# Altium PCB PCB.PcbDoc (part 3 of 3)
Units mm, origin at the board's own origin, x right, y up, seen from the top; angles counter-clockwise.
Board outline 68.58 x 53.34 mm, 4 copper layers (TOP, GND, SIG, BOTTOM), stack 1.586 mm thick; 257 components, 121 nets, 724 pads, 316 vias.
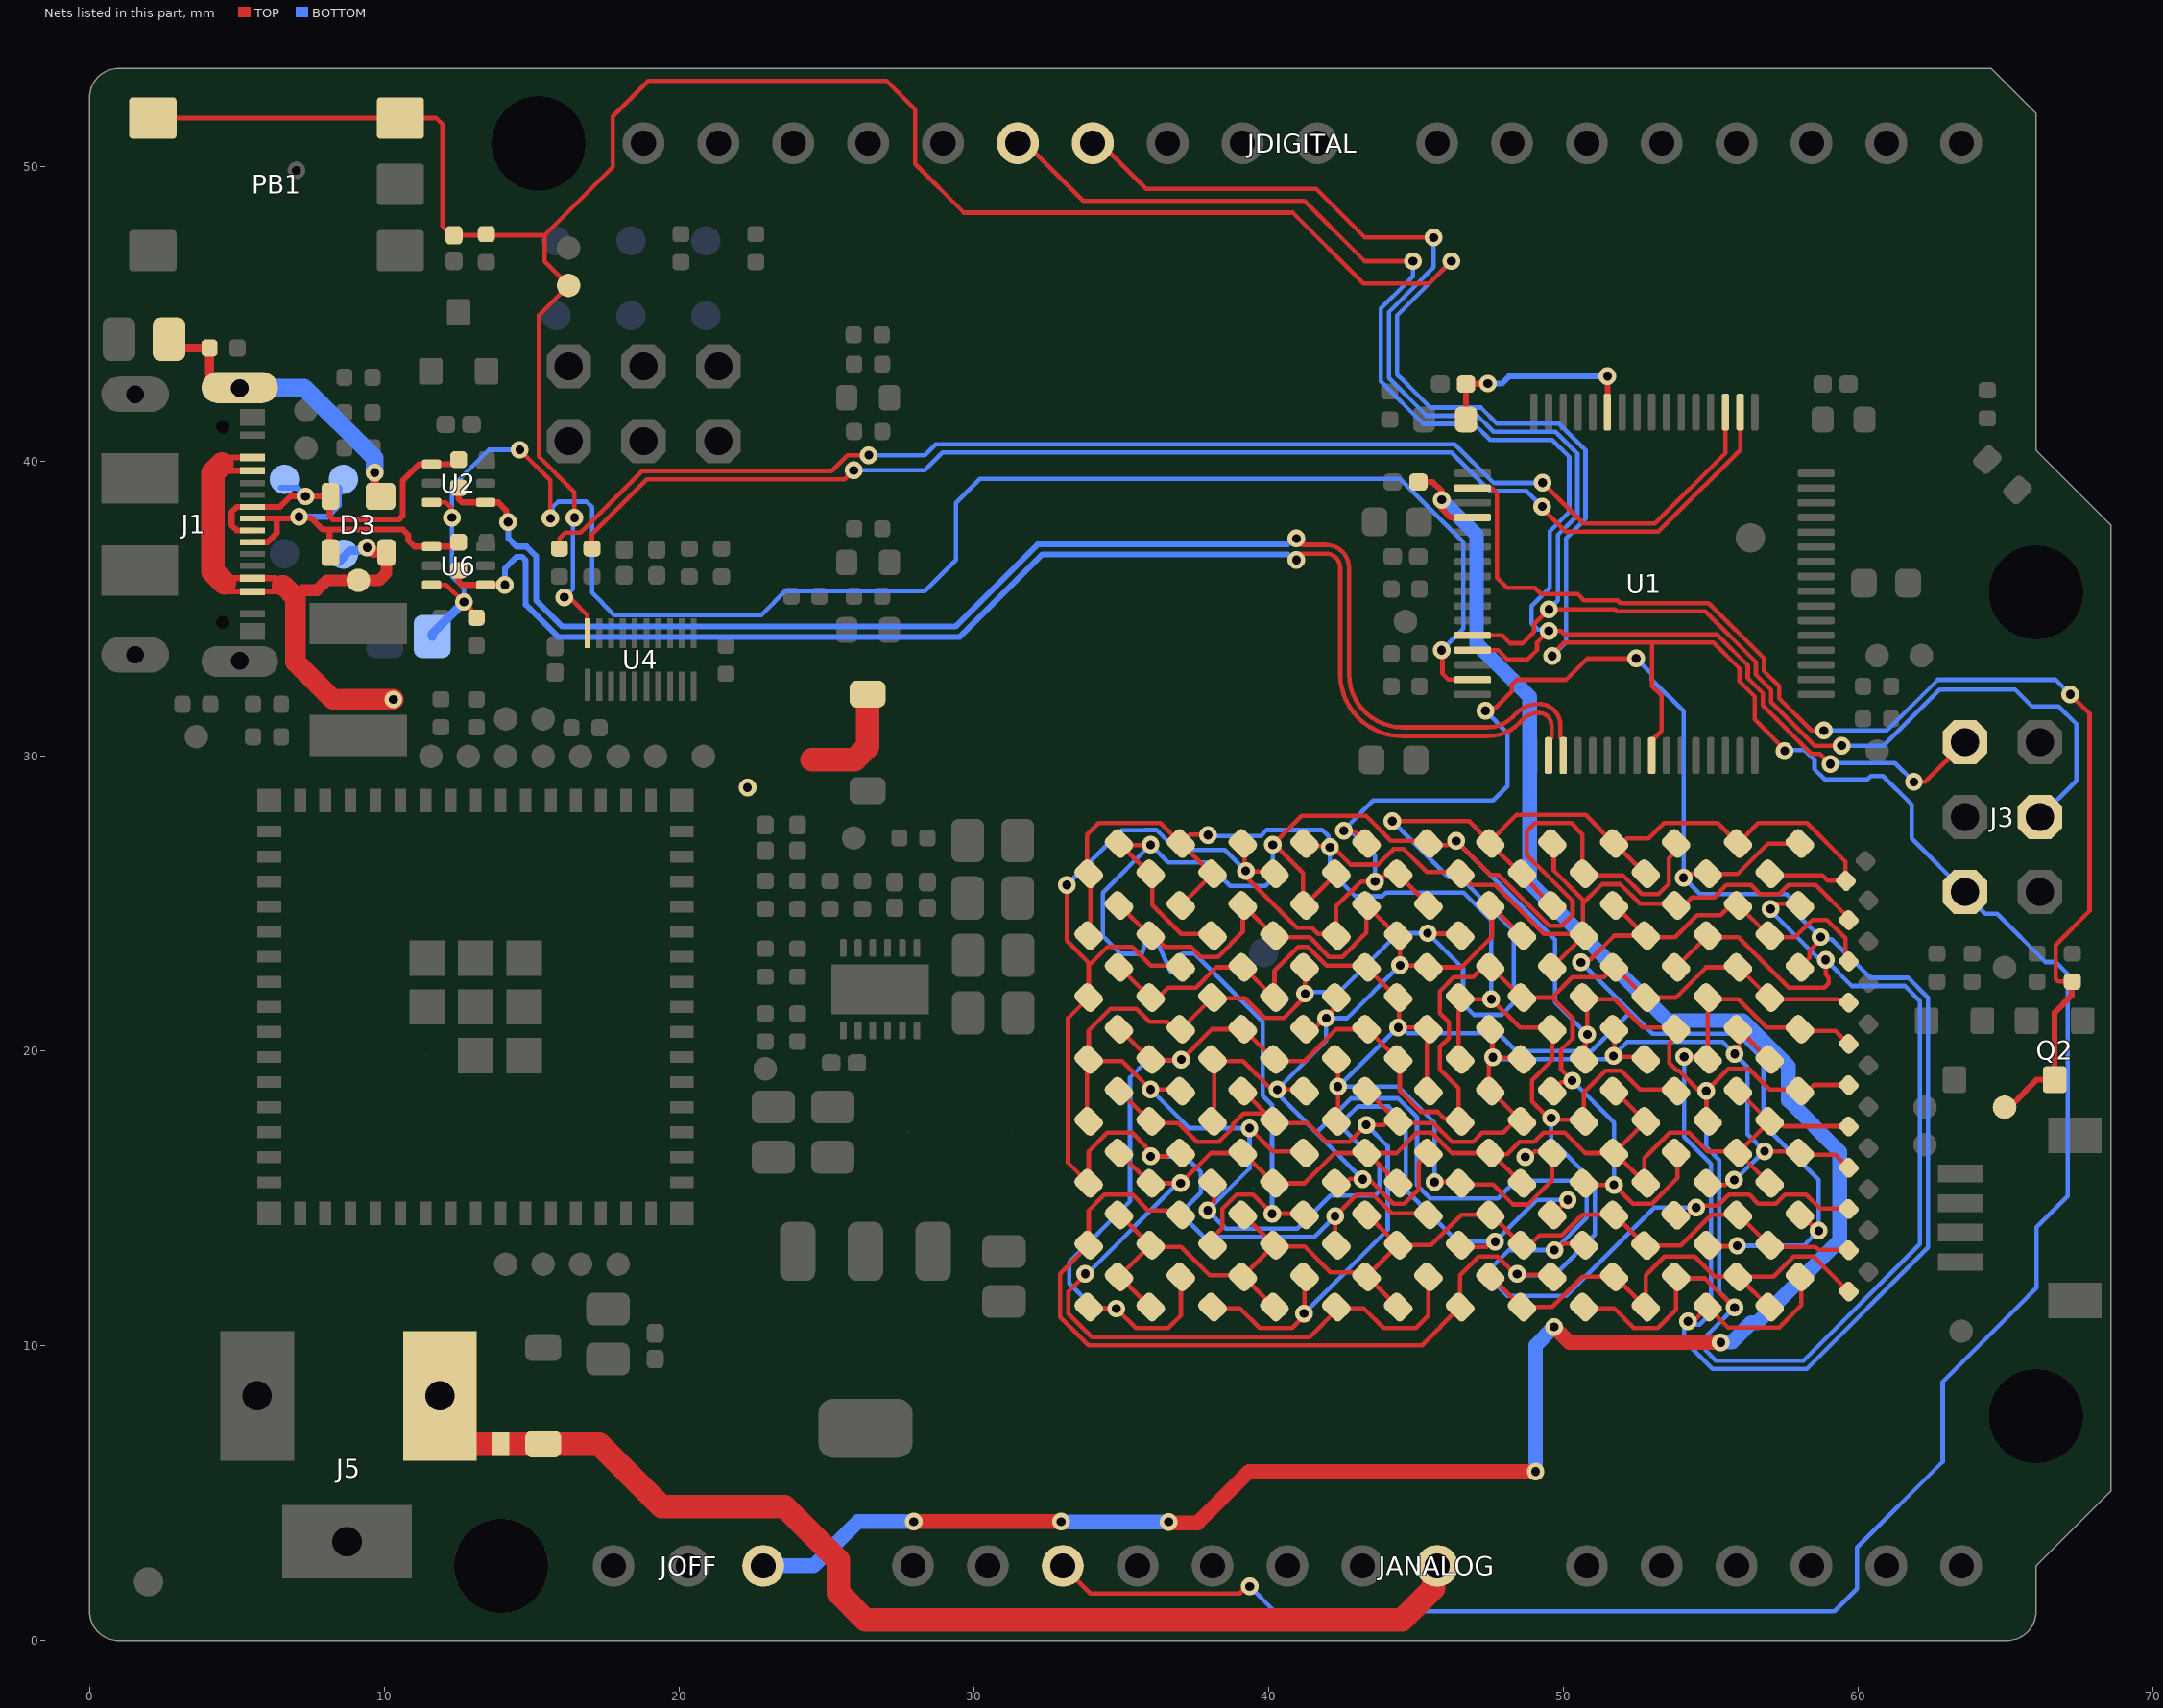
[diagram p5: the nets of this part, all layers, seen from the top]

## Via types
v1: diameter 0.6, hole 0.3, TOP to BOTTOM, tented both sides, 316 vias

## Nets (pads, with @x,y where several pads share a name; then routed paths per layer and width w, separated by ;. In a path a pad name is that pad's centre, name@x,y a point inside that pad or via, vN(x,y) a via of type N, cw(c..) or ccw(c..) an arc to the next point about the centre after c; other vN are vias at no path point) (continued)
P401_IIC0_SDA_1: P401_SDA.X Q2.3 R12.2 U1.2 | length 43.4
  TOP w0.15: U1.2@46.925,39.103 47.574,39.103 47.752,38.925 47.752,36.054 48.088,35.718 49.03,35.718 49.248,35.5 50.493,35.5 50.7,35.293 51.84,35.293 51.933,35.2 54.93,35.2 56.813,33.317 56.813,32.885 57.324,32.373 57.324,31.962 58.411,30.876 v1(58.842,30.876) ; v1(67.2,32.1) 67.854,31.446 67.854,24.754 66.7,23.6 66.7,22.447 66.788,22.359 R12.2@67.27,22.359
  TOP w0.2: P401_SDA.X@64.986,18.134 65.17,18.134 66.07,19.034 Q2.3@66.67,19.034 66.67,21.313 67.245,21.889 67.245,22.335 R12.2@67.27,22.359
  BOTTOM w0.15: v1(58.842,30.876) 60.982,30.876 62.706,32.6 66.7,32.6 v1(67.2,32.1)
P408_1: R1.2 SJ1.2 U1.15 U2.6 U6.6 | length 58.9
  TOP w0.15: U6.6@11.605,35.816 12.105,35.816 12.685,35.236 v1(12.704,35.236) 12.704,35.224 13.202,34.726 R1.2@13.225,34.726 ; U2.6@11.605,38.616 12.084,38.616 12.3,38.4 v1(12.3,38.1) ; v1(14.6,40.4) 15.639,39.361 v1(15.639,38.075) ; v1(45.873,33.6) 45.9,33.573 45.9,32.8 46.097,32.603 U1.15@46.925,32.603
  BOTTOM w0.15: v1(12.704,35.236) 12.704,35.696 12.3,36.1 v1(12.3,38.1) 12.3,39.146 13.554,40.4 v1(14.6,40.4) ; v1(15.639,38.075) 15.708,38.144 15.708,38.449 15.901,38.642 16.854,38.642 17.047,38.449 17.047,35.553 17.808,34.792 22.792,34.792 23.6,35.6 28.343,35.6 29.4,36.657 29.4,38.6 30.209,39.409 44.458,39.409 46.603,37.264 46.603,34.33 v1(45.873,33.6)
  BOTTOM w0.3: SJ1.2@11.63,34.066 11.63,34.162 v1(12.704,35.236)
P410_SPI0_MISO_GPT6_B_1: J3.1 JDIGITAL.13 U1.13 | length 54.6
  TOP w0.15: JDIGITAL.13@31.496,51.054 33.706,48.844 41.22,48.844 43.264,46.8 v1(44.9,46.8) ; U1.13@46.925,33.603 47.789,33.603 48.097,33.295 48.795,33.295 49.108,33.608 49.108,33.857 49.416,34.166 49.506,34.166 v1(49.506,34.256) ; v1@49.552,34.211 49.597,34.256 49.936,34.256 50.05,34.142 55.205,34.142 56.259,33.088 56.259,32.655 56.77,32.143 56.77,31.733 58.416,30.087 58.71,30.087 v1(59.058,29.739) ; v1(61.893,29.132) 62.279,29.132 J3.1@63.627,30.48
  BOTTOM w0.15: v1(44.9,46.8) 44.9,46.283 44.646,46.029 43.805,45.189 43.805,43.036 43.805,42.725 45.25,41.28 46.976,41.28 47.52,40.736 49.626,40.736 50.2,40.162 50.2,38.289 49.542,37.63 49.542,35.721 48.918,35.098 48.918,34.516 49.131,34.303 49.459,34.303 v1(49.506,34.256) ; v1(59.058,29.739) 59.095,29.776 61.249,29.776 v1(61.893,29.132)
P411_SPI0_MOSI_GPT6_A_1: J3.4 JDIGITAL.12 U1.12 | length 60.1
  TOP w0.15: JDIGITAL.12@34.036,51.054 35.846,49.244 41.62,49.244 43.264,47.6 v1(45.6,47.6) ; U1.12@46.925,34.103 47.925,34.103 48.192,33.835 48.625,33.835 49.004,34.214 49.004,34.474 v1(49.515,34.985) 51.757,34.985 51.818,34.923 54.815,34.923 56.536,33.203 56.536,32.77 57.047,32.258 57.047,31.848 58.531,30.364 v1(59.439,30.364)
  BOTTOM w0.15: v1(45.6,47.6) 45.6,46.592 44.923,45.915 44.082,45.074 44.082,43.151 44.082,42.84 45.365,41.557 47.091,41.557 47.635,41.013 49.74,41.013 50.361,40.392 50.477,40.277 50.477,38.174 50.354,38.051 49.819,37.516 49.819,35.289 v1(49.515,34.985) ; v1(59.439,30.364) 60.862,30.364 62.768,32.27 65.33,32.27 65.9,31.7 66.8,31.7 67.4,31.1 67.4,29.173 J3.4@66.167,27.94
P501_SCI1_TXD_1: R45.1 U1.50 | length 44.2
  TOP w0.15: R45.1@17.046,37.051 17.046,37.537 18.909,39.4 25.622,39.4 v1(25.925,39.703) ; v1(49.286,38.476) 49.286,38.414 50.079,37.621 53.224,37.621 53.553,37.949 56,40.396 U1.50@56,41.678
  BOTTOM w0.15: v1(25.925,39.703) 28.333,39.703 28.94,40.31 46.207,40.31 47.519,38.997 48.764,38.997 v1(49.286,38.476)
P502_SCI1_RXD_1: R46.1 U1.51 | length 44.7
  TOP w0.15: R46.1@15.946,37.051 15.946,37.393 16.144,37.592 16.662,37.592 18.747,39.677 25.177,39.677 25.717,40.217 v1(26.439,40.217) ; v1(49.299,39.281) 50.682,37.898 53.11,37.898 55.496,40.284 U1.51@55.496,41.674
  BOTTOM w0.15: v1(26.439,40.217) 28.338,40.217 28.708,40.587 46.321,40.587 47.634,39.274 49.292,39.274 v1(49.299,39.281)
R\E\S\E\T\_1: C1.1 J3.5 JANALOG.3 PB1.3 PB1.4 R3.1 RES.X U1.25 U4.20 | length 170.1
  TOP w0.15: PB1.4@2.15,51.653 10.266,51.653 PB1.3@10.357,51.744 ; PB1.3@10.55,51.653 11.757,51.653 11.966,51.444 11.966,47.99 12.083,47.872 12.173,47.872 C1.1@12.366,47.679 15.438,47.679 ; RES.X@16.056,45.934 16.056,45.774 15.24,44.958 15.24,40.17 16.454,38.956 v1(16.454,38.094) ; v1(16.11,35.399) 16.196,35.313 16.363,35.313 16.896,34.78 U4.20@16.896,34.176 ; RES.X@16.256,45.974 15.438,46.792 15.438,47.679 ; JANALOG.3@33.02,2.54 33.96,1.6 39.02,1.6 39.26,1.84 v1(39.36,1.84) ; v1(46.2,46.8) 45.444,46.044 43.22,46.044 40.82,48.444 29.664,48.444 28.009,50.099 28.009,51.946 27.043,52.912 18.956,52.912 17.75,51.706 17.75,49.991 15.438,47.679 ; v1(49.621,33.404) 49.621,33.453 50.033,33.865 53.01,33.865 ; U1.25@53.01,30.038 53.01,30.538 53.33,30.858 53.33,32.064 53.01,32.385 53.01,33.865 ; v1(57.509,30.186) 57.509,30.237 56.493,31.252 56.493,32.029 55.982,32.54 55.982,32.973 55.09,33.865 53.01,33.865 ; J3.5@63.358,25.4 J3.5@63.627,25.4
  BOTTOM w0.15: v1(16.11,35.399) 16.4,35.689 16.4,38.039 v1(16.454,38.094) ; v1(39.36,1.84) 40.2,1 59.2,1 59.961,1.761 59.961,3.161 62.871,6.071 62.871,8.788 65.447,11.365 66.058,11.975 66.058,14.031 67.106,15.079 67.106,22.618 66.7,23.024 66.356,23.024 64.718,24.661 64.313,24.661 63.627,25.347 J3.5@63.627,25.4 61.814,27.213 61.814,28.364 60.845,29.332 60.429,29.332 60.316,29.219 58.868,29.219 58.523,29.564 58.523,29.873 58.184,30.213 57.535,30.213 v1(57.509,30.186) ; v1(46.2,46.8) 44.359,44.959 44.359,42.954 44.584,42.73 44.878,42.436 45.48,41.834 47.205,41.834 47.749,41.29 49.855,41.29 50.638,40.507 50.754,40.391 50.754,38.059 50.631,37.936 50.096,37.401 50.096,33.879 v1(49.621,33.404)
RA4_1_N: R55.1 U1.18 U6.1 | length 48.2
  TOP w0.15: v1(40.946,36.663) cw(c41.16,36.663) 41.16,36.876 41.946,36.876 cw(c41.946,36.391) 42.431,36.391 42.431,32.791 ccw(c44.534,32.791) 44.534,30.688 47.46,30.688 ccw(c47.461,32.129) 48.477,31.107 48.478,31.108 48.634,31.264 cw(c49.146,30.752) 49.146,31.476 49.18,31.476 cw(c49.18,31.056) 49.6,31.056 49.6,30.628 49.5,30.528 U1.18@49.5,30.028
  TOP w0.2: R55.1@12.525,36.316 12.525,35.933 12.642,35.816 U6.1@13.445,35.816 ; U6.1@13.446,35.815 v1@14.093,35.815
  BOTTOM w0.2: v1(14.094,35.814) 14.094,36.374 14.487,36.767 14.684,36.767 14.801,36.65 14.801,35.145 15.895,34.051 29.521,34.051 32.321,36.851 40.649,36.851 40.838,36.663 v1(40.946,36.663)
RA4_1_P: R54.1 U1.19 U2.1 | length 49.1
  TOP w0.15: v1(40.946,37.39) ccw(c41.16,37.39) 41.16,37.176 41.946,37.176 cw(c41.946,36.391) 42.731,36.391 42.731,32.791 ccw(c44.534,32.791) 44.534,30.988 47.46,30.988 47.461,30.988 ccw(c47.461,32.129) 48.265,31.32 48.423,31.477 cw(c49.145,30.754) 49.145,31.776 49.18,31.776 cw(c49.18,31.056) 49.9,31.056 49.9,30.628 50,30.528 U1.19@50,30.028
  TOP w0.2: R54.1@12.525,39.116 12.525,38.733 12.642,38.616 13.875,38.616 14.144,38.347 14.144,38.005 v1(14.202,37.947)
  BOTTOM w0.2: v1(14.202,37.947) 14.214,37.935 14.214,37.39 14.487,37.117 14.829,37.117 15.151,36.795 15.151,35.29 16.04,34.401 29.376,34.401 32.176,37.201 36.509,37.201 40.649,37.201 40.838,37.39 v1(40.946,37.39)
ROW0_2: 1.A 2.C 3.A 4.C 7.A 8.C 13.A 14.C 21.A 22.C 31.A 32.C 43.A 44.C 57.A 58.C 73.A 74.C 91.A 92.C R34.1 | length 102.5
  TOP w0.15: 13.A@33.9,23.918 33.887,23.931 33.887,24.322 33.953,24.388 33.953,25.965 1.A@33.9,26.018 33.847,26.071 33.847,27.347 34.233,27.733 36.335,27.733 2.C@37.025,27.043 ; 74.C@37.025,14.443 36.714,14.443 36.557,14.6 35.917,14.6 35.384,15.133 34.433,15.133 33.9,14.6 33.9,13.835 33.887,13.822 33.887,13.431 73.A@33.9,13.418 32.933,12.451 32.933,10.975 33.885,10.023 45.205,10.023 91.A@46.5,11.318 46.487,11.331 46.487,11.722 46.5,11.735 46.5,12.4 47.133,13.033 47.767,13.033 48.359,12.441 v1(48.432,12.441) ; 14.C@37.025,24.943 3.A@38.1,26.018 38.075,26.018 37.05,27.043 2.C@37.025,27.043 ; v1(37.948,27.334) 37.931,27.351 37.333,27.351 2.C@37.025,27.043 ; 4.C@41.225,27.043 41.313,26.955 42.05,26.955 v1(42.085,26.919) 42.193,26.919 42.782,26.331 43.714,26.331 44.243,26.859 44.584,26.859 45.372,26.071 46.447,26.071 7.A@46.5,26.018 46.885,25.633 47.68,25.633 49.341,23.971 50.647,23.971 21.A@50.666,23.952 ; 43.A@46.5,19.718 46.447,19.771 46.447,21.347 46.513,21.413 31.A@46.513,21.805 ; 31.A@46.5,21.818 31.A@46.513,21.805 ; v1@48.454,12.419 49.55,12.419 92.C@49.625,12.343 ; v1@49.542,17.686 48.935,18.293 48.935,19.011 49.625,19.701 49.625,20.243 49.638,20.256 44.C@49.638,20.73 ; v1(49.591,17.735) 49.557,17.701 49.557,17.671 50.647,17.671 57.A@50.687,17.631 ; 44.C@49.625,20.743 49.568,20.8 48.525,20.8 v1(47.56,21.765) 46.553,21.765 31.A@46.513,21.805 ; 32.C@49.625,22.843 21.A@50.7,23.918 21.A@50.666,23.952 ; 8.C@49.625,27.043 49.678,26.99 49.678,26.124 50.666,25.136 50.666,25.013 ; 57.A@50.7,17.618 57.A@50.687,17.631 ; 58.C@53.825,18.643 53.772,18.696 52.604,18.696 51.967,19.333 51.433,19.333 50.7,18.6 50.7,18.035 50.687,18.022 57.A@50.687,17.631 ; R34.1@59.678,24.444 59.678,24.522 58.567,25.633 57.633,25.633 57.328,25.328 56.673,25.328 56.369,25.633 55.533,25.633 55.12,25.22 54.357,25.22 54.08,24.943 22.C@53.825,24.943 53.768,25 52.6,25 51.939,25.661 51.314,25.661 50.666,25.013 ; 21.A@50.666,23.952 50.666,24.834 50.666,25.013
  BOTTOM w0.15: v1(37.948,27.334) 37.984,27.298 39.734,27.298 39.939,27.503 41.82,27.503 42.028,27.294 42.028,26.976 v1(42.085,26.919) 42.085,26.115 42.946,25.254 43.863,25.254 43.991,25.382 46.618,25.382 47.56,24.44 v1(47.56,21.765) ; v1(48.432,12.441) 48.473,12.4 49.7,12.4 51.077,13.777 51.077,15.515 49.591,17.001 v1(49.591,17.735)
ROW1_2: 1.C 2.A 5.A 6.C 9.A 10.C 15.A 16.C 23.A 24.C 33.A 34.C 45.A 46.C 59.A 60.C 75.A 76.C 93.A 94.C R30.1 | length 135.8
  TOP w0.15: 1.C@34.925,27.043 34.973,26.995 1.C@34.998,26.995 ; v1(36,27) 35.995,26.995 1.C@34.998,26.995 ; 75.A@38.1,13.418 38.1,13.672 38.435,14.008 38.435,14.654 38.914,15.133 39.472,15.133 v1(40.122,14.483) 40.128,14.489 41.179,14.489 76.C@41.225,14.443 ; 15.A@38.1,23.918 38.047,23.971 37.029,23.971 36.053,24.947 36.053,25.965 2.A@36,26.018 35.975,26.018 1.C@34.998,26.995 ; 5.A@42.3,26.018 16.C@41.225,24.943 41.172,24.996 41.172,26.042 40.213,27.001 v1(40.147,27.001) 41.125,27.979 43.311,27.979 44.154,27.136 45.332,27.136 6.C@45.425,27.043 45.478,26.99 v1@46.105,26.99 ; v1(46.367,27.131) 47.517,25.981 47.792,25.981 49.52,24.254 49.954,24.254 50.315,24.615 50.315,25.095 49.401,26.009 49.401,26.011 48.762,26.65 48.762,27.462 49.033,27.733 50.267,27.733 50.647,27.353 50.647,26.071 9.A@50.7,26.018 50.764,25.954 52.038,25.954 52.663,25.328 53.228,25.328 53.578,25.678 53.578,26.542 53.825,26.789 10.C@53.825,27.043 ; 93.A@50.7,11.318 50.753,11.265 51.735,11.265 52.396,10.604 53.204,10.604 53.825,11.225 53.825,11.926 53.838,11.939 94.C@53.838,12.33 ; 45.A@50.7,19.718 50.687,19.731 50.687,20.122 50.754,20.189 50.754,20.501 v1(50.817,20.564) 50.817,21.317 50.793,21.341 50.793,21.725 33.A@50.753,21.765 ; 33.A@50.7,21.818 33.A@50.753,21.765 ; 94.C@53.825,12.343 94.C@53.838,12.33 ; 34.C@53.825,22.843 23.A@54.9,23.918 54.953,23.865 55.935,23.865 57.646,22.154 58.854,22.154 59,22.3 59,22.5 58.9,22.6 v1(58.9,23.1) ; 59.A@54.9,17.618 54.847,17.671 v1(54.847,18.653) ; v1(55.813,11.301) 55.799,11.301 54.81,12.29 53.878,12.29 94.C@53.838,12.33 ; v1(57.033,24.826) 57.155,24.826 57.325,24.996 57.972,24.996 24.C@58.025,24.943 ; R30.1@59.678,18.844 59.668,18.855 58.491,18.855 58.28,18.643 60.C@58.025,18.643 57.972,18.696 57.004,18.696 56.3,19.4 55.593,19.4 v1(54.847,18.653) ; 33.A@50.753,21.765 51.735,21.765 52.704,20.796 53.772,20.796 46.C@53.825,20.743 53.825,20.489 53.6,20.263 53.6,19.597 53.864,19.333 53.93,19.333 54.61,18.653 v1(54.847,18.653)
  BOTTOM w0.15: v1(40.122,14.483) 40.122,18.165 39.798,18.488 39.798,21.002 37.49,23.31 37.142,23.31 ccw(c37.142,23.16) 37.013,23.235 36.688,22.671 36,24.2 35.7,23.3 34.986,23.3 34.383,23.903 34.383,25.365 34.374,25.374 v1(36,27) 36.6,26.4 37.9,26.4 38.7,25.6 39.9,25.6 40.147,25.847 v1(40.147,27.001) ; v1(46.367,27.131) 49.722,23.776 49.722,21.658 v1(50.817,20.564) ; v1(54.847,18.653) 54.847,16.753 55.288,16.312 55.288,11.826 v1(55.813,11.301) 55.135,10.622 54.84,10.328 54.84,9.839 55.18,9.5 58.146,9.5 62.1,13.454 62.1,21.702 61.592,22.21 59.79,22.21 v1(58.9,23.1) ; v1(57.033,24.826) 57.033,24.767 v1@58.614,23.186
ROW2_2: 3.C 4.A 5.C 6.A 11.A 12.C 17.A 18.C 25.A 26.C 35.A 36.C 47.A 48.C 61.A 62.C 77.A 78.C 95.A 96.C R31.1 | length 137.5
  TOP w0.15: v1(33.158,25.639) 33.158,23.742 33.9,23 33.9,22.9 ; 61.A@33.899,15.518 61.A@33.887,15.53 ; 62.C@37.025,16.543 36.638,16.543 36.525,16.43 v1(36.003,16.43) 36.003,16.552 35.865,16.689 35.865,16.735 35.368,17.232 34.532,17.232 33.899,16.599 33.899,15.935 33.887,15.922 61.A@33.887,15.53 ; 26.C@37.025,22.843 36.972,22.896 36.004,22.896 35.367,23.533 34.533,23.533 33.9,22.9 ; 3.C@39.125,27.043 39.178,26.99 v1@39.178,26.218 ; v1@39.178,26.116 39.178,25.959 40.952,24.185 41.461,24.185 41.676,23.971 42.247,23.971 17.A@42.287,23.931 ; v1@39.25,26.093 40.124,26.093 4.A@40.2,26.018 ; 77.A@42.3,13.418 42.257,13.461 v1(42.257,14.397) 42.992,15.133 43.541,15.133 44.177,14.496 45.372,14.496 78.C@45.425,14.443 ; 17.A@42.3,23.918 17.A@42.287,23.931 ; v1(42.551,27.477) 42.587,27.442 42.926,27.442 5.C@43.325,27.043 ; 18.C@45.425,24.943 45.425,24.968 44.4,25.993 6.A@44.4,26.018 44.394,26.024 44.002,26.024 43.735,25.756 43.139,25.756 42.3,24.918 42.3,24.335 42.287,24.322 17.A@42.287,23.931 ; v1(47.357,31.545) 47.443,31.631 47.686,31.631 48.258,32.203 48.258,32.437 48.421,32.6 50.1,32.6 50.814,33.314 52.461,33.314 v1(52.472,33.325) ; v1(54.102,19.805) 54.119,19.788 54.83,19.788 47.A@54.887,19.731 ; v1@54.306,10.724 95.A@54.9,11.318 55.589,10.628 57.327,10.628 58.078,11.38 58.078,12.29 96.C@58.025,12.343 ; 54.351,26.031 54.887,26.031 11.A@54.9,26.018 54.913,26.005 55.304,26.005 55.317,26.018 55.918,26.018 56.943,27.043 57.608,27.043 57.62,27.056 58.012,27.056 12.C@58.025,27.043 ; 47.A@54.9,19.718 47.A@54.887,19.731 ; 35.A@54.9,21.818 35.A@54.913,21.805 ; 36.C@58.025,22.843 58.351,23.17 58.351,23.399 58.729,23.777 v1(58.729,23.87) ; R31.1@59.678,20.244 59.233,20.69 58.078,20.69 48.C@58.025,20.743 57.972,20.796 56.904,20.796 55.935,21.765 54.953,21.765 35.A@54.913,21.805 ; 61.A@33.887,15.53 33.2,16.217 33.2,21.118 25.A@33.9,21.818 33.887,21.831 33.887,22.222 33.9,22.235 33.9,22.9 ; 47.A@54.887,19.731 54.887,20.205 54.9,20.218 54.9,21.317 54.913,21.33 35.A@54.913,21.805
  BOTTOM w0.15: v1(33.158,25.639) 35.019,27.5 35.79,27.5 35.792,27.502 36.208,27.502 36.878,26.832 38.512,26.832 v1(39.228,26.116) ; v1(36.003,16.43) 37.17,16.43 37.7,15.9 37.7,15.2 37.2,14.7 37.2,14.3 37.796,13.704 41.563,13.704 v1(42.257,14.397) ; v1(42.551,27.477) 42.637,27.391 42.869,27.391 43.613,26.647 v1(43.613,25.756) ; v1@42.718,27.666 43.553,28.5 47.62,28.5 48.113,28.993 48.113,30.789 v1(47.357,31.545) ; v1(52.472,33.325) 52.997,32.8 52.997,32.611 54.08,31.528 v1(54.08,25.882) 54.634,25.328 57.571,25.328 58.062,24.838 58.062,24.515 58.707,23.87 v1(58.729,23.87) 58.8,23.799 59.101,23.799 60.413,22.487 61.706,22.487 62.377,21.817 62.377,13.339 58.261,9.223 55.065,9.223 54.1,10.188 54.1,10.709 v1(54.228,10.837) 54.341,10.724 54.624,10.724 55.011,11.111 55.011,16.176 54.101,17.087 v1(54.102,19.805)
ROW3_2: 7.C 8.A 9.C 10.A 11.C 12.A 19.A 20.C 27.A 28.C 37.A 38.C 49.A 50.C 63.A 64.C 79.A 80.C R2.1 | length 95.1
  TOP w0.15: 49.A@33.9,17.618 33.847,17.671 33.847,19.247 33.913,19.313 37.A@33.913,19.705 ; 50.C@37.025,18.643 36.972,18.696 36.004,18.696 v1(36,18.7) 35.035,19.665 33.953,19.665 37.A@33.913,19.705 ; v1(37.933,14.598) 37.933,14.69 38.153,14.909 38.153,15.465 63.A@38.1,15.518 ; v1(39.355,17.388) 40.147,16.596 41.172,16.596 64.C@41.225,16.543 ; 28.C@41.225,22.843 41.241,22.827 41.241,21.841 40.528,21.128 39.872,21.128 39.2,21.8 38.118,21.8 27.A@38.1,21.818 38.C@37.025,20.743 36.817,20.743 36.561,21 35.957,21 35.525,21.433 34.633,21.433 33.9,20.7 33.9,20.135 33.887,20.122 33.887,19.731 37.A@33.9,19.718 37.A@33.913,19.705 ; v1(44.2,27.8) 46.8,27.8 7.C@47.525,27.075 ; v1(45.4,24) 45.415,23.985 46.432,23.985 19.A@46.5,23.918 ; 79.A@46.5,13.418 46.553,13.365 47.393,13.365 47.567,13.539 v1(47.689,13.539) ; 80.C@49.625,14.443 49.643,14.443 v1(50.152,14.952) ; 20.C@49.625,24.943 48.575,25.993 7.C@47.525,27.043 7.C@47.525,27.075 ; 9.C@51.778,26.99 9.C@51.725,27.043 ; 9.C@51.803,26.99 52.775,26.018 10.A@52.8,26.018 ; 12.A@57,26.018 57.053,25.965 58.79,25.965 58.968,25.787 59.574,25.787 59.574,26.426 58.267,27.733 56.615,27.733 11.C@55.925,27.043 55.235,27.733 53.411,27.733 52.898,27.22 52.164,27.22 51.987,27.043 9.C@51.725,27.043 ; 7.C@47.525,27.075 47.525,27.125 48.41,28.01 50.758,28.01 9.C@51.725,27.043
  BOTTOM w0.15: v1(36,18.7) 37.312,17.388 v1(39.355,17.388) 39.355,16.02 v1(37.933,14.598) 38.551,13.981 40.981,13.981 42.1,15.1 43.612,15.1 43.769,15.257 43.769,16.131 42.6,17.3 42.6,17.7 43.023,18.123 44.077,18.123 44.662,17.538 44.662,15.293 46.416,13.539 v1(47.689,13.539) 49.102,14.952 v1(50.152,14.952) ; v1(41.241,21.948) 41.293,22 42.4,22 44.4,24 v1(45.4,24) 46.6,22.8 46.6,21.6 46.969,21.231 47.909,21.231 48.323,21.645 48.323,24.074 46.503,25.894 46.106,25.894 v1(44.2,27.8)
ROW4_2: 13.C 14.A 15.C 16.A 17.C 18.A 19.C 20.A 29.A 30.C 39.A 40.C 51.A 52.C 65.A 66.C 81.A 82.C R27.1 | length 77.9
  TOP w0.15: 13.C@34.925,24.943 34.95,24.943 35.975,23.918 36.09,23.918 36.476,23.533 37.367,23.533 37.7,23.2 38.283,23.2 39.125,24.042 39.125,24.443 39.138,24.456 15.C@39.138,24.93 ; 51.A@38.1,17.618 38.087,17.631 38.087,18.022 38.153,18.088 39.A@38.153,19.665 ; 39.A@38.1,19.718 39.A@38.153,19.665 ; 15.C@39.15,24.943 40.175,23.918 16.A@40.2,23.918 40.255,23.863 41.392,23.863 42.055,23.2 42.5,23.2 43.325,24.025 43.325,24.526 43.338,24.539 17.C@43.338,24.93 ; 52.C@41.225,18.643 41.172,18.696 v1(40.3,18.696) 40.104,18.696 39.135,19.665 39.A@38.153,19.665 ; 40.C@41.225,20.743 41.531,20.743 41.922,21.134 v1@41.974,21.134 ; v1(41.957,21.117) 41.957,21.169 42.3,21.511 29.A@42.3,21.818 ; 65.A@42.3,15.518 42.607,15.518 42.761,15.672 v1@43.195,15.672 ; 17.C@43.325,24.943 17.C@43.338,24.93 ; v1@43.393,15.672 44.237,14.828 44.611,14.828 45.089,15.307 45.089,16.207 66.C@45.425,16.543 ; 18.A@44.375,23.893 17.C@43.338,24.93 ; 18.A@44.4,23.918 44.458,23.859 44.458,22.918 v1(44.464,22.912) 44.472,22.904 45.364,22.904 30.C@45.425,22.843 45.438,22.83 45.83,22.83 45.842,22.843 46.543,22.843 47.578,23.878 47.578,24.89 19.C@47.525,24.943 47.55,24.943 48.575,23.918 20.A@48.6,23.918 ; v1(49.7,13.252) 49.792,13.252 50.011,13.471 50.647,13.471 81.A@50.7,13.418 ; 82.C@53.813,14.431 53.866,14.378 54.177,14.378 54.276,14.476 54.295,14.476 v1(54.509,14.691) 54.574,14.755 55.244,14.755 55.621,15.133 56.31,15.133 56.615,14.828 57.211,14.828 57.515,15.133 58.24,15.133 58.718,14.655 59.668,14.655 R27.1@59.678,14.644
  BOTTOM w0.15: 41.626,17.226 v1(43.195,15.657) ; v1(44.464,22.912) 42.668,21.117 v1(41.957,21.117) 41.957,20.353 v1(40.3,18.696) 40.3,18.574 40.451,18.423 40.451,18.405 41.628,17.228 42.8,18.4 44.4,18.4 45.04,17.76 45.04,15.44 45.479,15 47.784,15 48.384,15.6 50.6,15.6 50.8,15.4 50.8,14.352 v1(49.7,13.252) 48.152,13.252 47.6,12.7 47.6,12.2 48.1,11.7 50.1,11.7 53.091,14.691 v1(54.509,14.691)
ROW5_2: 21.C 22.A 23.C 24.A 25.C 26.A 27.C 28.A 29.C 30.A 41.A 42.C 53.A 54.C 67.A 68.C 83.A 84.C R33.1 | length 75
  TOP w0.15: 25.C@34.925,22.843 34.95,22.843 35.975,21.818 26.A@36,21.818 36.254,21.818 36.59,22.154 37.535,22.154 38.224,22.843 39.15,22.843 28.A@40.175,21.818 ; 28.A@40.187,21.831 40.187,22.222 40.2,22.235 40.2,22.719 41.014,23.533 41.33,23.533 41.967,22.896 43.272,22.896 29.C@43.325,22.843 30.A@44.375,21.793 ; 53.A@42.3,17.618 42.287,17.631 42.287,18.022 42.353,18.088 v1(42.353,18.8) 42.353,19.665 41.A@42.3,19.718 ; 30.A@44.4,21.818 44.426,21.791 44.426,20.826 v1(44.4,20.8) 44.402,20.798 45.37,20.798 42.C@45.425,20.743 ; 54.C@45.425,18.643 45.372,18.696 45.372,20.273 45.438,20.339 42.C@45.438,20.73 ; v1(45.632,15.557) 45.639,15.564 46.454,15.564 67.A@46.5,15.518 46.545,15.472 47.623,15.472 48.295,14.8 48.8,14.8 49.625,15.625 49.625,16.126 49.638,16.139 49.638,16.53 68.C@49.625,16.543 49.572,16.596 49.018,16.596 48.832,16.41 v1(48.71,16.41) ; v1(50.6,23.009) 50.686,23.096 50.908,23.096 51.73,23.918 52.382,23.918 52.395,23.931 22.A@52.762,23.931 ; 21.C@51.725,24.943 51.75,24.943 22.A@52.762,23.931 ; 83.A@54.9,13.418 54.935,13.382 55.882,13.382 v1(55.9,13.4) ; 84.C@58.025,14.443 58.077,14.443 58.614,13.906 v1(58.666,13.906) ; R33.1@59.678,23.044 59.678,23.27 59.569,23.379 59.569,23.831 58.947,24.453 58.444,24.453 57.855,23.865 57.053,23.865 24.A@57,23.918 56.975,23.918 55.95,24.943 23.C@55.925,24.943 55.67,24.943 55.335,24.607 54.539,24.607 53.797,23.865 52.853,23.865 22.A@52.8,23.918 52.787,23.931 22.A@52.762,23.931
  BOTTOM w0.15: v1(42.353,18.8) v1@42.376,18.8 ; v1(45.632,15.557) 45.632,17.568 44.4,18.8 v1@42.376,18.8 ; v1(50.6,23.009) 53.026,20.584 55.902,20.584 56.786,19.7 56.786,17.514 58.666,15.634 v1(58.666,13.906) 58.16,13.4 v1(55.9,13.4) ; 52.2,21.3 52.2,21.238 50.962,20 48.4,20 47.8,20.6 44.713,20.6 44.513,20.8 44.376,20.8 v1@42.376,18.8
ROW6_2: 31.C 32.A 33.C 34.A 35.C 36.A 37.C 38.A 39.C 40.A 41.C 42.A 55.A 56.C 69.A 70.C 85.A 86.C R32.1 | length 66.4
  TOP w0.15: 85.A@33.9,11.318 33.953,11.265 v1(34.835,11.265) 35.5,10.6 36.6,10.6 37.025,11.025 37.025,11.926 37.038,11.939 37.038,12.33 86.C@37.025,12.343 ; 37.C@34.925,20.743 34.95,20.743 35.975,19.718 38.A@36,19.718 36.027,19.69 v1@37.015,19.69 ; v1@37.049,19.716 38.076,20.743 38.708,20.743 38.72,20.756 39.112,20.756 39.C@39.125,20.743 39.15,20.743 40.175,19.718 40.A@40.2,19.718 40.253,19.665 41.215,19.665 42.293,20.743 42.908,20.743 42.92,20.756 43.312,20.756 41.C@43.325,20.743 43.35,20.743 44.375,19.718 42.A@44.4,19.718 44.453,19.665 44.453,18.647 45.157,17.943 45.737,17.943 45.97,17.711 46.406,17.711 55.A@46.447,17.671 ; 55.A@46.5,17.618 55.A@46.447,17.671 ; 56.C@49.625,18.898 56.C@49.625,18.643 49.932,18.95 50.25,18.95 v1(50.3,19) ; v1@50.2,19.1 49.923,19.377 49.923,20.044 50.315,20.436 50.315,21.121 49.618,21.818 ; 69.A@50.7,15.518 50.753,15.465 v1(51.719,15.465) 52.356,14.828 53.011,14.828 53.878,15.695 53.878,16.49 70.C@53.825,16.543 ; R32.1@59.678,21.644 59.452,21.644 59.332,21.765 57.053,21.765 36.A@57,21.818 56.975,21.818 55.95,22.843 35.C@55.925,22.843 55.912,22.856 55.52,22.856 55.508,22.843 54.843,22.843 53.818,21.818 53.217,21.818 53.204,21.805 52.813,21.805 34.A@52.8,21.818 52.775,21.818 51.75,22.843 33.C@51.725,22.843 51.389,22.507 50.307,22.507 49.618,21.818 ; 55.A@46.447,17.671 46.447,18.745 45.81,19.381 45.81,20.144 46.115,20.448 46.115,20.979 45.81,21.284 45.81,22.029 46.288,22.507 46.935,22.507 47.27,22.843 31.C@47.525,22.843 47.55,22.843 48.575,21.818 32.A@48.6,21.818 48.613,21.805 49.087,21.805 49.1,21.818 49.618,21.818
  BOTTOM w0.15: v1(34.835,11.265) 34.088,11.265 33.235,12.118 33.235,12.835 35.3,14.9 35.3,19.1 35.871,19.671 36.996,19.671 v1(37.04,19.716) ; v1(50.3,19) 51.719,17.581 v1(51.719,15.465)
ROW7_2: 43.C 44.A 45.C 46.A 47.C 48.A 49.C 50.A 51.C 52.A 53.C 54.A 55.C 56.A 71.A 72.C 87.A 88.C R28.1 | length 58.8
  TOP w0.15: 49.C@34.925,18.643 34.95,18.643 35.975,17.618 50.A@36,17.618 36.053,17.565 36.935,17.565 37.572,16.928 38.311,16.928 38.789,17.407 38.789,17.532 39.147,17.89 39.75,17.89 40.022,17.618 52.A@40.2,17.618 40.253,17.565 41.324,17.565 41.961,16.928 42.744,16.928 v1(43.315,17.5) 43.902,17.5 44.02,17.618 54.A@44.375,17.618 ; 87.A@38.1,11.318 38.153,11.265 39.035,11.265 39.7,10.6 40.8,10.6 v1@41.225,11.025 ; 51.C@39.125,18.643 39.15,18.643 52.A@40.162,17.631 ; v1@41.225,11.1 41.225,11.926 41.238,11.939 41.238,12.33 88.C@41.225,12.343 ; 53.C@43.325,18.643 43.35,18.643 54.A@44.375,17.618 ; 43.C@47.525,20.743 47.595,20.674 47.595,19.806 v1(47.611,19.789) ; 56.A@48.6,17.618 56.A@48.575,17.618 ; 44.A@48.6,19.718 48.538,19.78 47.62,19.78 v1(47.611,19.789) ; 45.C@51.725,20.743 51.739,20.729 51.739,19.874 v1(51.7,19.835) 51.732,19.803 52.715,19.803 46.A@52.8,19.718 ; 71.A@54.9,15.518 54.953,15.465 55.508,15.465 55.678,15.635 v1(55.8,15.635) ; v1(55.815,19.902) 55.815,20.024 55.971,20.181 55.971,20.662 55.989,20.679 47.C@55.925,20.743 ; 47.C@56.001,20.691 56.975,19.718 48.A@57,19.718 ; v1(56.829,16.606) 56.833,16.601 57.967,16.601 72.C@58.025,16.543 58.078,16.49 59.233,16.49 R28.1@59.678,16.044 ; 54.A@44.375,17.618 54.A@44.4,17.618 44.453,17.565 45.59,17.565 46.226,16.928 46.944,16.928 47.248,17.233 47.96,17.233 48.345,17.618 56.A@48.575,17.618 ; v1(47.611,19.789) 47.611,19.667 47.472,19.528 47.472,18.696 55.C@47.525,18.643 47.55,18.643 56.A@48.575,17.618
  BOTTOM w0.15: v1(41.2,11.1) 44.046,13.946 44.046,16.769 v1(43.315,17.5) ; v1(47.611,19.789) 47.677,19.723 51.466,19.723 51.529,19.785 51.65,19.785 52.172,20.307 55.41,20.307 v1(55.815,19.902) 56.25,19.467 56.25,17.184 v1(56.829,16.606) 56.806,16.606 55.835,15.635 v1(55.8,15.635)
ROW8_2: 57.C 58.A 59.C 60.A 61.C 62.A 63.C 64.A 65.C 66.A 67.C 68.A 69.C 70.A 71.C 72.A 89.A 90.C R29.1 | length 60
  TOP w0.15: v1(33.783,12.449) 33.783,12.407 33.21,11.834 33.21,11.09 34,10.3 41.4,10.3 42.3,11.2 89.A@42.3,11.318 42.353,11.265 43.235,11.265 43.9,10.6 45,10.6 45.425,11.025 45.425,11.926 45.438,11.939 45.438,12.33 90.C@45.425,12.343 ; 61.C@34.925,16.543 34.95,16.543 35.975,15.518 62.A@36,15.518 36.013,15.505 36.404,15.505 36.417,15.518 v1(37.018,15.518) 38.043,16.543 38.708,16.543 38.72,16.556 39.112,16.556 63.C@39.125,16.543 39.15,16.543 40.175,15.518 64.A@40.2,15.518 40.213,15.505 40.604,15.505 40.617,15.518 41.218,15.518 42.243,16.543 42.908,16.543 42.92,16.556 43.312,16.556 65.C@43.325,16.543 43.338,16.53 65.C@43.363,16.53 ; 66.A@44.4,15.518 44.375,15.518 65.C@43.363,16.53 ; 68.A@48.6,15.518 48.575,15.518 67.C@47.595,16.498 ; 57.C@51.725,18.643 51.75,18.643 52.775,17.618 58.A@52.8,17.618 69.C@51.725,16.543 ; 59.C@55.925,18.643 55.95,18.643 56.975,17.618 60.A@57,17.618 ; 72.A@57,15.518 56.975,15.518 55.95,16.543 71.C@55.925,16.543 ; R29.1@59.678,17.444 59.668,17.455 57.474,17.455 57.311,17.618 60.A@57,17.618 ; 65.C@43.363,16.53 43.73,16.53 43.742,16.543 44.343,16.543 45.033,17.233 45.53,17.233 46.22,16.543 47.108,16.543 47.12,16.556 47.512,16.556 67.C@47.525,16.543 47.571,16.498 67.C@47.595,16.498 ; 67.C@47.595,16.498 48.088,16.498 48.515,16.925 49.025,16.925 49.333,17.233 50.054,17.233 50.743,16.543 51.308,16.543 51.32,16.556 51.712,16.556 69.C@51.725,16.543 ; 69.C@51.725,16.543 51.75,16.543 52.775,15.518 70.A@52.8,15.518 52.747,15.571 52.747,16.366 53.614,17.233 54.26,17.233 54.896,16.596 55.872,16.596 71.C@55.925,16.543 ; 71.C@55.925,16.543 60.A@57,17.618
  BOTTOM w0.15: v1(33.783,12.449) 33.849,12.449 36.918,15.518 v1(37.018,15.518)
ROW9_2: 73.C 74.A 75.C 76.A 77.C 78.A 79.C 80.A 81.C 82.A 83.C 84.A 85.C 86.A 87.C 88.A 89.C 90.A R16.1 | length 38.7
  TOP w0.15: 73.C@34.925,14.443 34.95,14.443 35.975,13.418 74.A@36,13.418 ; 86.A@36,11.318 35.975,11.318 34.95,12.343 85.C@34.925,12.343 74.A@36,13.418 ; 75.C@39.125,14.443 39.15,14.443 40.175,13.418 76.A@40.2,13.418 ; 88.A@40.2,11.318 40.175,11.318 39.15,12.343 87.C@39.125,12.343 ; 77.C@43.325,14.443 43.35,14.443 44.375,13.418 78.A@44.4,13.418 ; 90.A@44.4,11.318 44.375,11.318 43.35,12.343 89.C@43.325,12.343 ; R16.1@59.678,13.244 59.668,13.255 58.659,13.255 58.55,13.365 57.053,13.365 84.A@57,13.418 56.975,13.418 55.95,14.443 83.C@55.925,14.443 55.912,14.456 55.52,14.456 55.508,14.443 55.024,14.443 53.987,13.406 53.205,13.406 53.192,13.393 52.8,13.393 82.A@52.787,13.406 52.775,13.406 51.737,14.443 81.C@51.725,14.443 51.712,14.456 51.32,14.456 51.308,14.443 50.643,14.443 49.954,13.754 49.19,13.754 48.854,13.418 48.575,13.418 47.55,14.443 79.C@47.525,14.443 47.512,14.456 47.12,14.456 47.108,14.443 46.543,14.443 45.518,13.418 44.817,13.418 44.804,13.405 44.413,13.405 78.A@44.4,13.418 ; 74.A@36,13.418 36.053,13.365 37.035,13.365 38.004,12.396 39.072,12.396 87.C@39.125,12.343 ; 87.C@39.125,12.343 76.A@40.2,13.418 ; 76.A@40.2,13.418 40.245,13.372 41.228,13.372 42.1,12.5 42.857,12.5 43.014,12.343 89.C@43.325,12.343 ; 89.C@43.325,12.343 78.A@44.4,13.418
ROW10_2: 91.C 92.A 93.C 94.A 95.C 96.A R14.1 | length 17.3
  TOP w0.15: 91.C@47.525,12.343 47.55,12.343 48.575,11.318 92.A@48.6,11.318 48.613,11.305 49.004,11.305 49.017,11.318 49.618,11.318 50.643,12.343 51.308,12.343 51.32,12.356 51.712,12.356 93.C@51.725,12.343 51.75,12.343 94.A@52.775,11.318 ; 94.A@52.8,11.318 52.787,11.331 52.787,11.722 52.8,11.735 52.8,12.4 53.433,13.033 54.459,13.033 55.149,12.343 55.508,12.343 55.52,12.356 55.912,12.356 95.C@55.925,12.343 55.938,12.33 95.C@55.963,12.33 ; 96.A@57,11.318 56.975,11.318 95.C@55.963,12.33 ; R14.1@59.678,11.844 58.49,13.033 57.814,13.033 57.124,12.343 56.342,12.343 56.33,12.33 95.C@55.963,12.33
SHIELD1_1: C21.2 D3.1 J1.SHIELD1 R39.2 | length 10.1
  TOP w0.3: C21.2@2.7,44.153 3,43.853 R39.2@4.075,43.853 4.075,42.964 4.553,42.486 J1.SHIELD1@5.1,42.486 ; D3.1@9.675,39.221 9.678,39.224 v1(9.678,39.629)
  BOTTOM w0.6: J1.SHIELD1@5.1,42.486 5.125,42.511 7.284,42.511 9.678,40.118 v1(9.678,39.629)
USB_D_1_N: D3.3 D-.X J1.A7 J1.B7 R53.2 R55.2 U6.4 | length 12
  TOP w0.2: J1.A7@5.525,37.266 6.044,37.266 6.353,37.575 6.353,38.066 ; J1.B7@5.525,38.066 6.353,38.066 ; D3.3@8.175,36.911 8.146,36.94 8.146,37.691 ; R55.2@12.525,37.266 12.375,37.116 U6.4@11.605,37.116 11.027,37.116 10.817,37.326 10.817,37.513 10.639,37.691 8.146,37.691 ; 6.353,38.066 7.047,38.066 v1(7.11,38.129) 7.146,38.093 7.51,38.093 7.912,37.691 8.146,37.691
  BOTTOM w0.2: v1(7.11,38.129) 8.072,38.129 8.459,38.516 8.459,38.9 ; 8.481,38.9 D-.X@8.481,39.116
USB_D_1_P: D3.2 D+.X J1.A6 J1.B6 R21.2 R54.2 U2.4 | length 12.2
  TOP w0.2: J1.B6@5.525,37.666 5,37.666 4.824,37.842 4.824,38.29 5,38.466 J1.A6@5.525,38.466 6.47,38.466 6.825,38.821 v1(7.333,38.821) D3.2@7.975,38.821 ; D3.2@8.175,38.821 8.143,38.789 8.143,38.158 8.261,38.041 10.508,38.041 10.625,38.158 10.625,39.354 11.188,39.916 U2.4@11.605,39.916 12.375,39.916 R54.2@12.525,40.066
  BOTTOM w0.2: D+.X@6.5,39.116 7.038,39.116 v1(7.333,38.821)
VBATT_1: C8.2 JOFF.3 U1.4 | length 78.4
  TOP w0.2: C8.2@45.085,39.306 45.572,39.306 v1@45.875,39.003 ; 45.875,38.403 46.175,38.103 U1.4@46.925,38.103
  TOP w0.5: v1(27.96,4.04) v1(32.96,4.04) ; v1(36.608,4.033) 36.641,4 37.6,4 39.34,5.74 v1(49.06,5.74) ; v1(49.685,10.645) 50.213,10.116 v1@55.339,10.116
  BOTTOM w0.5: JOFF.3@22.86,2.54 24.564,2.54 26.064,4.04 v1(27.96,4.04) ; v1(32.96,4.04) 32.967,4.033 v1(36.608,4.033) ; v1(45.874,38.703) 47.055,37.522 47.055,33.822 48.862,32.016 48.862,25.705 53.531,21.036 56.09,21.036 57.638,19.488 57.638,18.327 59.373,16.592 59.373,13.573 56.586,10.786 56.38,10.786 55.733,10.139 55.362,10.139 v1(55.342,10.12) ; v1(49.06,5.74) 49.06,10.02 v1(49.685,10.645)
VIN: D1.A J5.1 JANALOG.8 VIN_TOP.X | length 41.6
  TOP w0.8: J5.1@11.06,7.218 11.06,8 J5.1@11.26,7.8 ; J5.1@11.89,7.521 J5.1@12.74,6.671 ; J5.1@11.89,8.306 11.89,7.264 12.483,6.671 D1.A@15.395,6.671 16.695,6.671 17.295,6.671 19.412,4.554 23.578,4.554 25.4,2.732 25.4,1.626 26.326,0.7 44.521,0.7 45.601,1.78 45.601,2.421 JANALOG.8@45.72,2.54
VREFH0_1: C7.2 L1.2 U1.59 | length 7.3
  TOP w0.2: L1.2@46.7,41.428 C7.2@46.7,42.628 46.709,42.637 47.43,42.637 v1(47.439,42.646) ; U1.59@51.5,41.678 v1(51.5,42.9)
  BOTTOM w0.2: v1(47.439,42.646) 47.912,42.646 48.166,42.9 v1(51.5,42.9)
VUSB: D2.A D3.4 J1.A4 J1.A9 J1.B4 J1.B9 VBUS_CONN.X VCONN_TOP.X | length 26.7
  TOP w0.2: J1.B9@5.525,39.691 4.734,39.691 4.5,39.925 4.526,39.925 4.742,40.141 J1.A4@5.525,40.141 ; 6.308,35.591 J1.A9@5.525,35.591 4.742,35.591 4.526,35.807 4.5,35.807 4.576,35.883 4.734,36.041 J1.B4@5.525,36.041 6.316,36.041
  TOP w0.4: 6.986,35.397 7.229,35.64 7.723,35.64 8.053,35.97 VCONN_TOP.X@9.125,35.97 9.826,35.97 10.075,36.219 D3.4@10.075,36.911 ; v1(9.42,37.087) 9.474,37.087 9.63,36.93 9.856,36.93 D3.4@9.875,36.911
  TOP w0.7: 6.536,35.807 6.576,35.807 6.986,35.397 6.986,33.201 8.255,31.932 v1(10.309,31.932)
  TOP w0.8: 4.5,39.925 4.185,39.61 4.185,36.275 4.576,35.883 ; 24.516,29.89 25.966,29.89 26.4,30.324 D2.A@26.4,32.111
  BOTTOM w0.3: VBUS_CONN.X@8.481,36.616 8.481,36.622 8.843,36.984 9.144,36.984 9.189,37.03 9.362,37.03 v1(9.42,37.087)
  other v1: 22.325,28.941
pads on no net: Fiducial_1.1 Fiducial_2.1 J1.A8 J1.B8 J1.FIXING J1.SHIELD2 J1.SHIELD3 J1.SHIELD4 M1.6 M1.14 M1.15 M1.16 M1.17 M1.18 M1.19 M1.20 M1.21 M1.22 M1.25 M1.26 M1.27 M1.28 M1.29 M1.30 M1.31 M1.32 M1.33 M1.34 M1.41 M1.44 U1.3 U1.6 U1.7 U1.14 U3.8

## Polygon pours and split planes (outlines as drawn)
GND on SIG "GND_L03_P060" (solid, remove dead copper, pour order 60): 0,1 0,52.34 cw(c1,52.34) 1,53.34 64.516,53.34 66.04,51.816 66.04,40.386 68.58,37.846 68.58,5.08 66.04,2.54 66.04,1 cw(c65.04,1) 65.04,0 1,0 cw(c1,1)
+5V on SIG "+5V_L03_P045" (solid, remove dead copper, pour order 45): 55,42 55,38 57.556,36.296 57.556,35.229 53.327,31 50,31 48,33 45,33 42.7,35.3 42.7,42 46,42 51,42 53,42
GND on BOTTOM "SS" (solid, remove dead copper, pour order 69): 0,1 0,52.34 cw(c1,52.34) 1,53.34 64.516,53.34 66.04,51.816 66.04,40.386 68.58,37.846 68.58,5.08 66.04,2.54 66.04,1 cw(c65.04,1) 65.04,0 1,0 cw(c1,1)
+5V on BOTTOM "+5V_L04_P065" (solid, remove dead copper, pour order 65): 24.525,47.466 26.025,45.966 26.025,34.966 24.525,34.966 17.525,34.966 17.025,35.466 17.025,36.466 18.025,37.466 23.525,37.466 23.525,42.966 21.025,45.466 16.525,45.466 14.525,43.466 14.525,36.466 13.525,35.466 9.342,35.466 9.342,36.283 10.525,37.466 10.525,40.966 11.525,41.966 11.525,44.466 14.525,47.466 19.025,47.466
VUSB on BOTTOM "VUSB_L04_P064" (solid, remove dead copper, pour order 64): 10.422,33.1 14.232,29.29 22.346,29.29 22.346,28.276 21.446,27.376 12.246,27.376 9.469,30.153 9.469,33.1
+5V on BOTTOM "+5V_L04_P062" (solid, remove dead copper, pour order 62): 39.125,1.6 39.125,5.975 35.125,9.975 35.125,15.847 48.058,15.847 48.134,27.12 37.853,27.12 37.853,30.676 46.146,30.676 46.146,37.276 45.535,37.846 44.666,37.846 41.86,35.04 32.51,35.04 30.446,32.976 24.735,32.976 24.525,32.766 24.525,31.166 26.025,29.666 26.025,24.674 29.5,24.674 29.5,1.6
NetBUCK_IN_TOP_X on BOTTOM "NETBUCK_IN_TOP_X_L04_P056" (solid, remove dead copper, pour order 56): 15.6,8.745 18.245,8.745 25.5,15.696 25.5,17.871 26.191,18.7 27.426,18.7 27.7,18.974 27.7,20.208 24.234,20.208 22.9,18.874 22.9,15.725 17.231,10.056 15.6,10.056
GND on TOP "GND_L01_P046" (solid, remove dead copper, pour order 71): 0,1 0,52.34 cw(c1,52.34) 1,53.34 64.516,53.34 66.04,51.816 66.04,40.386 68.58,37.846 68.58,5.08 66.04,2.54 66.04,1 cw(c65.04,1) 65.04,0 1,0 cw(c1,1)
+3V3 on TOP "+3V3_L01_P070" (solid, remove dead copper, pour order 70): 9.05,14.857 9.05,14.072 9.546,13.576 14.146,13.576 14.746,12.976 14.746,12.376 15.146,11.976 18.79,11.956 19.99,12.956 21.39,12.956 22.434,14 24.89,14 24.89,11.076 10.346,11.076 8.65,12.772 8.65,14.815
+3V3_I2C on TOP "+3V3_I2C_L01_P068" (solid, remove dead copper, pour order 68): 36.364,4.486 37.06,4.486 38.874,6.3 59.02,6.3 63.06,10.34 63.06,14.226 61.6,14.226 61.6,11.6 59.7,9.7 36.364,9.7
GND on GND "GND_L02_P002" (solid, remove dead copper, pour order 2): 0,1 0,52.34 cw(c1,52.34) 1,53.34 64.516,53.34 66.04,51.816 66.04,40.386 68.58,37.846 68.58,5.08 66.04,2.54 66.04,1 cw(c65.04,1) 65.04,0 1,0 cw(c1,1)

## Keep-outs
TOP:
  rectangle: 0.25,13.625 5.25,29.175
GND:
  rectangle: 0.25,13.625 5.25,29.175
SIG:
  rectangle: 0.25,13.625 5.25,29.175
BOTTOM:
  rectangle: 0.25,13.625 5.25,29.175

## Other copper
TOP:
  region net VUSB: 245 vertices and 2 holes, not listed, extent 21.568,28.581 25.293,31.5
  region net NetC12_1: 27.5,19.456 27.584,19.535 27.586,20.299 28.1,19.785 28.1,16.6 27.5,16.6
  region net +3V3: 14.679,11.676 14.679,12.88 13.983,13.576 12.546,13.576 12.546,11.676
  pour cut-out: 773 vertices and 0 holes, not listed, extent 0.99,7.137 3.371,9.505
GND:
  pour cut-out: 773 vertices and 0 holes, not listed, extent 0.99,7.137 3.371,9.505
SIG:
  region: 585 vertices and 2 holes, not listed, extent 1.245,7.87 3.13,8.77
  pour cut-out: 773 vertices and 0 holes, not listed, extent 0.99,7.137 3.371,9.505
BOTTOM:
  region net NetLOVE_X: 1461 vertices and 0 holes, not listed, extent 38.596,22.053 41.053,24.425
  region: 1833 vertices and 1 holes, not listed, extent 2.686,46.104 7.428,50.926
  region: 250 vertices and 0 holes, not listed, extent 4.108,45.171 5.325,45.859
  region: 241 vertices and 0 holes, not listed, extent 6.363,46.342 6.985,47.605
  pour cut-out: 773 vertices and 0 holes, not listed, extent 0.99,7.137 3.371,9.505
  text "1.1" at 9.4,0.3 h1
  text "V" at 10.7,0.3 h1

## Silkscreen, mask and mechanical layers (free items; w line width, h text height)
Top Solder:
  region: 773 vertices and 0 holes, not listed, extent 0.99,7.137 3.371,9.505
Bottom Solder:
  drawing of 2 lines, arcs and shapes, not listed
Route Tool Path:
  lines w2: -1,6.306 -1,1 ccw(c1,1) 1,-1 65.04,-1 ccw(c65.04,1) 67.04,1 67.04,2.126 69.287,4.373 ; -1,10.306 -1,35.866 ; -1,39.866 -1,52.34 cw(c1,52.34) 1,54.34 64.516,54.34 ; 69.58,19.463 69.58,5.08 ; 69.58,23.463 69.58,37.846 ; 64.516,54.34 cw(c64.516,53.34) 65.223,54.047 ; 64.516,54.34 cw(c64.516,53.34) 65.223,54.047 ; 65.223,54.047 66.747,52.523 ; 66.747,52.523 cw(c66.04,51.816) 67.04,51.816 ; 66.747,52.523 cw(c66.04,51.816) 67.04,51.816 ; 67.04,51.816 67.04,40.8 69.287,38.553 ; 69.287,4.373 ccw(c68.58,5.08) 69.58,5.08 ; 69.287,4.373 ccw(c68.58,5.08) 69.58,5.08 ; 69.287,38.553 cw(c68.58,37.846) 69.58,37.846 ; 69.287,38.553 cw(c68.58,37.846) 69.58,37.846
Board:
  lines w0.127: 1,0 cw(c1,1) 0,1 0,52.34 cw(c1,52.34) 1,53.34 ; 1,0 65.04,0 ; 1,0 65.04,0 ; 1,53.34 64.516,53.34 ; 1,53.34 64.516,53.34 ; 64.516,53.34 66.04,51.816 ; 64.516,53.34 66.04,51.816 ; 65.04,0 ccw(c65.04,1) 66.04,1 ; 66.04,1 66.04,2.54 ; 66.04,1 66.04,2.54 ; 66.04,2.54 68.58,5.08 ; 66.04,2.54 68.58,5.08 ; 66.04,40.386 68.58,37.846 ; 66.04,40.386 66.04,51.816 ; 66.04,40.386 66.04,51.816 ; 66.04,40.386 68.58,37.846 ; 68.58,5.08 68.58,37.846 ; 68.58,5.08 68.58,37.846
TestPoint:
  lines w0.05: 4.44,6.106 6.94,6.106 6.94,10.506 4.44,10.506 4.44,6.106 ; 6.54,2.106 6.54,4.606 10.941,4.606 10.941,2.106 6.54,2.106 ; 10.64,6.106 13.14,6.106 13.14,10.506 10.64,10.506 10.64,6.106
POGO_NORI:
  drawing of 200 lines, arcs and shapes, not listed
UNOR3_holes:
  drawing of 172 lines, arcs and shapes, not listed